# Altium PCB ALLPRINT-CAPBOARD-677512.PcbDoc (part 2 of 3)
Units mm, origin at the board's own origin, x right, y up, seen from the top; angles counter-clockwise.
Board outline 105 x 100 mm, 4 copper layers (Top Layer, Layer 1, Layer 2, Bottom Layer), stack 1.586 mm thick; 295 components, 219 nets, 882 pads, 764 vias.
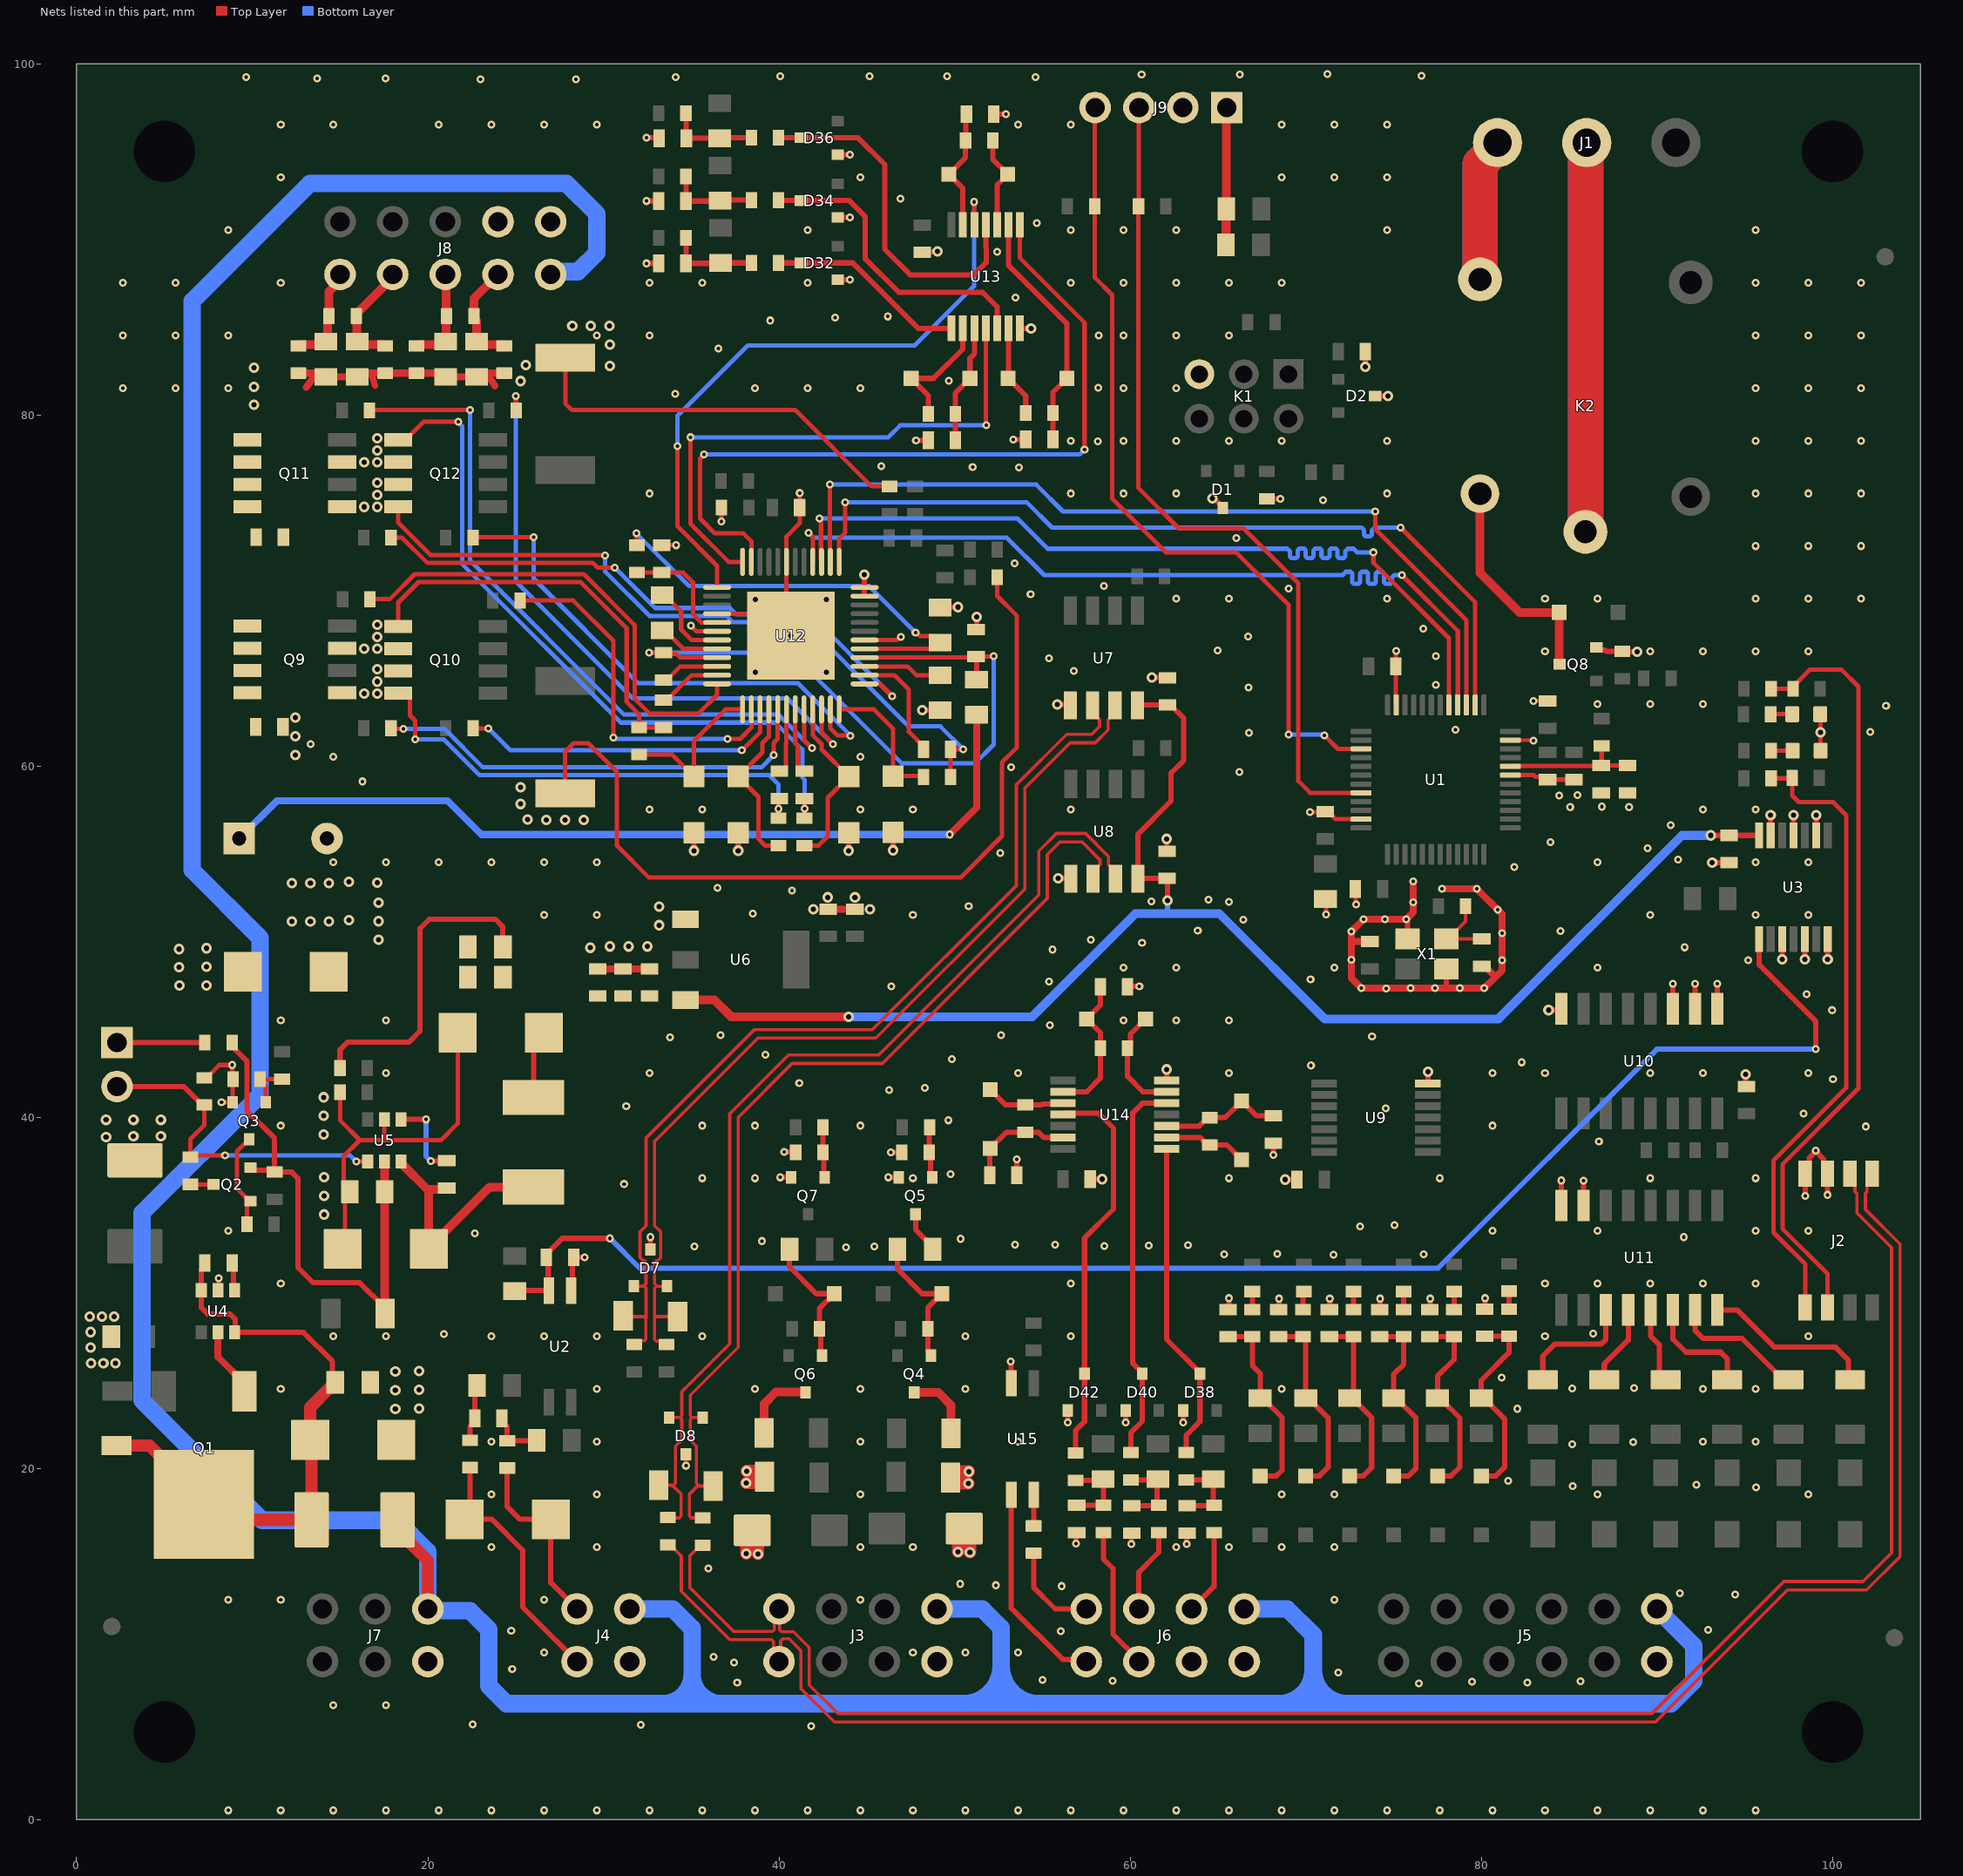
[diagram p4: the nets of this part, all layers, seen from the top]

## Via types
v1: diameter 0.45, hole 0.2, Top Layer to Bottom Layer, tented both sides, 591 vias
v2: diameter 0.6, hole 0.3, Top Layer to Bottom Layer, tented both sides, 173 vias

## Nets (pads, with @x,y where several pads share a name; then routed paths per layer and width w, separated by ;. In a path a pad name is that pad's centre, name@x,y a point inside that pad or via, vN(x,y) a via of type N, cw(c..) or ccw(c..) an arc to the next point about the centre after c; other vN are vias at no path point) (continued)
5V: C15.2 C20.2 C21.2 C22.2 C25.2 C26.2 C28.2 C29.2 D6.2 L3.2 R22.2 U3.14 U6.3 U7.8 U8.8 | length 111.1
  Top Layer w0.3: R22.2@15,42.8 15,43.85 15.425,44.275 18.925,44.275 19.55,44.9 19.55,50.75 20.075,51.275 23.85,51.275 24.275,50.85 C26.2@24.275,49.7 ; D6.2@25.67,45.73 D6.2@26.6,44.8 26.025,44.225 L3.2@26.025,41.125 ; U7.8@60.405,63.45 60.43,63.475 C28.2@62.125,63.475 62.3,63.475 63.05,62.725 63.05,60.325 62.325,59.6 62.325,58 60.43,56.105 U8.8@60.43,53.575 60.455,53.6 C29.2@62.1,53.6 62.125,53.575 62.1,53.55 62.125,53.525 v2(62.125,52.35) ; v2(93.075,56.05) C15.2@94.1,56.05 U3.14@95.825,56.05
  Top Layer w0.5: U6.3@34.675,46.675 36.325,46.675 37.275,45.725 v2(43.975,45.725)
  Bottom Layer w0.3: 62.125,51.65 v2(62.125,52.35)
  Bottom Layer w0.5: v2(43.975,45.725) 54.425,45.725 60.3,51.6 62.125,51.6 ; 62.125,51.65 62.125,51.6 ; v2(93.075,56.05) 91.425,56.05 80.975,45.6 71.075,45.6 65.075,51.6 62.125,51.6
+VM: C39.1 C41.2 C53.2 D26.2 F2.1 Q9.5 Q9.6 Q9.7 Q9.8 Q11.5 Q11.6 Q11.7 Q11.8 R60.2 | length 49.6
  Top Layer w0.4: v1(49.725,56.1) 51.25,57.625 R60.2@51.25,62.925
  Bottom Layer w0.4: C39.1@9.256,55.875 11.406,58.025 21.125,58.025 23.05,56.1 v1(49.725,56.1)
  other v2: 1.675,38.875 3.237,38.925 4.8,38.925 1.675,39.85 3.237,39.85 4.8,39.85 5.85,47.5 7.4,47.5 5.838,48.538 7.4,48.563 5.838,49.575 7.4,49.625
AUX_N: D8.2 PTC5.2 R33.1 U8.7 | length 58.4
  Top Layer w0.184: R33.1@33.15,19.05 33.921,19.05 ; PTC5.2@33.675,17.2 33.687,17.187 34.313,17.187 34.421,17.295 34.421,17.627 34.421,18.55 33.921,19.05 ; D8.2@33.75,22.9 34.351,22.9 ; U8.7@59.16,53.575 59.16,54 58.877,54.283 58.874,54.283 58.767,54.391 58.767,54.851 57.459,56.159 55.8,56.159 54.8,55.159 54.8,52.659 45.683,43.542 40.542,43.542 37.191,40.191 37.191,27.1 34.458,24.367 34.458,23.008 34.351,22.9 ; 33.921,19.05 34.001,19.05 34.108,19.158 34.108,21.271 34.458,21.621 34.458,22.792 34.351,22.9
AUX_P: D8.1 PTC4.1 R33.2 U8.6 | length 56.8
  Top Layer w0.184: PTC4.1@35.65,17.175 35.638,17.187 35.012,17.187 34.904,17.295 34.904,17.827 34.904,18.55 35.354,19 35.442,19 ; D8.1@35.65,22.9 35.049,22.9 ; R33.2@36.25,19 35.442,19 ; U8.6@57.89,53.575 57.89,54 58.173,54.283 58.176,54.283 58.283,54.391 58.283,54.651 57.259,55.675 56,55.675 55.284,54.958 55.284,52.458 45.883,43.058 40.742,43.058 37.675,39.991 37.675,26.9 34.942,24.166 34.942,23.008 35.049,22.9 ; 35.049,22.9 34.942,22.792 34.942,21.621 35.292,21.271 35.292,20.329 35.292,19.15 35.442,19
BMA1: C43.1 C44.2 J8.6 MOV1.1 MOV2.2 Q9.1 Q10.7 Q10.8 R65.2 | length 32.9
  Top Layer w0.25: Q10.8@18.306,64.145 18.731,64.145 18.981,63.895 18.981,62.884 19.275,62.59 v1(19.275,61.525) ; v1(39.975,57.563) 39.975,58.1 C44.2@40.025,58.15
  Top Layer w0.5: MOV1.1@12.625,83.925 12.7,84 14.029,84 C43.1@14.2,84.171 14.3,84.271 14.3,85.55 MOV2.2@14.375,85.625 14.375,87.023 15,87.648 J8.6@15,88
  Bottom Layer w0.25: v1(19.275,61.525) 20.9,61.525 22.95,59.475 39.45,59.475 39.975,58.95 v1(39.975,57.563)
  other v2: 16.375,64.132 17.125,64.132 17.125,64.807 17.125,65.507
BMA2: C45.2 C47.2 J8.7 MOV2.1 MOV3.2 Q9.3 Q10.5 Q10.6 R66.2 | length 29.7
  Top Layer w0.25: Q10.5@18.306,67.955 18.306,69.306 19.475,70.475 28.7,70.475 31.325,67.85 31.325,63.65 32.025,62.95 R66.2@32.025,62.2 C45.2@33.425,62.2
  Top Layer w0.5: MOV3.2@17.575,83.925 17.5,84 16.146,84 C47.2@15.975,84.171 15.95,84.196 15.95,85.6 MOV2.1@15.925,85.625 15.925,85.75 18,87.825 J8.7@18,88
  other v2: 16.375,66.672 17.125,66.672 17.125,67.347 17.125,68.047
BMB1: C56.1 C57.2 J8.9 MOV4.1 MOV5.2 Q11.1 Q12.7 Q12.8 R67.2 | length 47.4
  Top Layer w0.25: Q12.8@18.306,74.77 18.306,73.869 20.15,72.025 30.05,72.025 v1(30.088,71.988) ; R67.2@49.775,59.375 C57.2@49.775,60.95 v1(50.5,60.95)
  Top Layer w0.5: J8.9@24,88 22.625,86.625 MOV5.2@22.625,85.625 22.625,85.5 22.775,85.35 C56.1@22.775,84.171 22.946,84 24.275,84 MOV4.1@24.35,83.925
  Bottom Layer w0.25: v1(30.088,71.988) 30.088,71.085 32.622,68.55 37.001,68.55 37.351,68.2 41.447,68.2 46.222,63.425 46.225,63.425 47.393,62.257 49.193,62.257 v1(50.5,60.95)
  other v2: 16.375,74.757 17.125,74.757 17.125,75.432 17.125,76.132
BMB2: C58.2 C59.2 J8.8 MOV5.1 MOV6.2 Q11.3 Q12.5 Q12.6 R69.2 | length 46
  Top Layer w0.25: Q12.5@18.306,78.58 18.731,78.58 19.751,79.6 v1(21.725,79.6) ; R69.2@41.45,57.025 C58.2@41.45,58.15
  Top Layer w0.5: MOV6.2@19.35,83.925 19.425,84 20.85,84 C59.2@21.021,84.171 21.048,84.198 21.048,85.598 MOV5.1@21.075,85.625 21.038,85.663 21.038,87.963 J8.8@21,88
  Bottom Layer w0.25: v1(21.725,79.6) 21.725,79.579 21.95,79.354 21.95,71.514 30.989,62.475 39.789,62.475 41.325,60.939 41.325,59.346 41.45,59.221 v1(41.45,57.575)
  other v2: 16.375,77.297 17.125,77.297 17.125,77.972 17.125,78.672
CA1: C44.1 U12.42 | length 3.8
  Top Layer w0.25: C44.1@40.025,59.7 40.2,59.7 40.4,59.9 40.4,61.247 40.425,61.272 40.425,61.828 U12.42@40.425,63.225
CA2: C45.1 U12.35 | length 3.6
  Top Layer w0.25: C45.1@33.425,63.75 33.6,63.75 35.025,65.175 U12.35@36.475,65.175
CB1: C57.1 U12.2 | length 6.6
  Top Layer w0.25: U12.2@44.875,65.175 46.575,65.175 47.4,64.35 47.4,61.95 48.225,61.125 C57.1@48.225,60.95
CB2: C58.1 U12.43 | length 3.8
  Top Layer w0.25: U12.43@40.925,63.225 40.925,61.964 40.925,61.302 41.075,61.152 41.075,59.9 41.275,59.7 C58.1@41.45,59.7
CLK: U1.27 U12.14 | length 49.3
  Top Layer w0.25: v1(42.9,76.025) 42.9,71.65 U12.14@42.925,71.625 ; v1(73.95,74.5) 73.95,73.5 79.15,68.3 U1.27@79.15,63.475
  Bottom Layer w0.25: v1(42.9,76.025) 54.65,76.025 56.175,74.5 v1(73.95,74.5)
CM0: J1.2 K2.3 | length 44.4
  Top Layer w2: K2.3@85.925,73.339 85.963,73.376 85.963,95.462 J1.2@86,95.5
  Bottom Layer w2: K2.3@85.925,73.339 85.925,95.5 J1.2@86,95.5
COM_N: D7.2 PTC3.2 R31.1 U7.7 | length 54.9
  Top Layer w0.184: 32.917,28.575 32.917,30.267 33.024,30.375 33.067,30.375 ; PTC3.2@33.6,27.05 33.408,27.242 33.014,27.242 32.907,27.35 32.907,28.542 33.014,28.65 R31.1@34.225,28.65 ; D7.2@33.625,30.375 33.067,30.375 ; U7.7@59.135,63.45 59.135,63.025 58.852,62.742 58.849,62.742 58.742,62.634 58.742,62.055 58.012,61.325 56.584,61.325 54,58.742 54,52.989 45.52,44.508 38.808,44.508 32.917,38.617 32.917,33.825 33.267,33.475 33.267,32.004 33.096,31.833 33.024,31.833 32.917,31.726 32.917,30.525 33.067,30.375
COM_P: D7.1 PTC2.1 R31.2 U7.6 | length 54.9
  Top Layer w0.184: R31.2@31.125,28.7 31.175,28.65 32.315,28.65 32.423,28.542 32.423,27.371 32.315,27.263 31.963,27.263 PTC2.1@31.75,27.05 ; D7.1@31.725,30.375 32.283,30.375 ; 32.433,28.575 32.433,30.267 32.326,30.375 32.283,30.375 ; U7.6@57.865,63.45 57.865,63.025 58.148,62.742 58.151,62.742 58.258,62.634 58.258,62.255 57.811,61.809 56.383,61.809 53.517,58.942 53.517,53.189 45.319,44.992 38.608,44.992 32.433,38.817 32.433,33.825 32.083,33.475 32.083,32.004 32.254,31.833 32.326,31.833 32.433,31.726 32.433,30.525 32.283,30.375
CS: U1.26 U12.13 | length 48.4
  Top Layer w0.25: U12.13@43.425,71.625 43.425,72.95 43.775,73.3 v1(43.775,75.025) ; v1(75.4,73.575) 79.65,69.325 U1.26@79.65,63.475
  Bottom Layer w0.25: v1(43.775,75.025) 54.1,75.025 55.55,73.575 72.6,73.575 73.175,73.575 73.321,73.429 73.321,73.165 73.411,73.075 73.681,73.075 73.771,73.165 73.771,73.429 73.918,73.575 74.475,73.575 v1(75.4,73.575)
EN0: J6.6 R97.1 | length 4.9
  Top Layer w0.3: J6.6@63.5,12 64.775,13.275 R97.1@64.775,16.35
EN1: J6.7 R101.1 | length 4.8
  Top Layer w0.3: J6.7@60.5,12 60.5,14.1 61.625,15.225 R101.1@61.625,16.35
EN2: J6.3 R105.1 | length 8.2
  Top Layer w0.3: R105.1@58.475,16.35 58.475,14.85 59.025,14.3 59.025,10.55 60.5,9.075 J6.3@60.5,9
ENCA: U12.24 U13.4 | length 31.5
  Top Layer w0.25: v1(34.95,78.725) 34.95,73.8 37.125,71.625 U12.24@37.925,71.625 ; U13.4@51.775,84.925 51.788,84.912 51.788,79.413 v1(51.8,79.4)
  Bottom Layer w0.25: v1(34.95,78.725) 46.225,78.725 46.9,79.4 v1(51.8,79.4)
ENCB: U12.23 U13.8 | length 44.5
  Top Layer w0.25: v1(35.725,77.75) 35.725,77.729 35.5,77.504 35.5,74.1 36.35,73.25 37.975,73.25 38.425,72.8 U12.23@38.425,71.625 ; U13.8@53.725,90.825 53.725,88.925 57.4,85.25 v1(57.4,78.025)
  Bottom Layer w0.25: v1(35.725,77.75) 57.125,77.75 v1(57.4,78.025)
ENCN: U12.25 U13.12 | length 36.7
  Top Layer w0.25: v1(34.225,78.225) 34.225,73.65 36.475,71.4 U12.25@36.475,70.175 ; v1(51.1,92.125) 51.113,92.112 51.113,90.837 U13.12@51.125,90.825
  Bottom Layer w0.25: v1(34.225,78.225) 34.225,79.95 38.225,83.95 47.725,83.95 51.1,87.325 v1(51.1,92.125)
EXP_SCL: J9.4 R12.1 U1.39 | length 47.1
  Top Layer w0.25: J9.4@58,97.5 57.987,97.487 57.987,91.887 R12.1@57.975,91.875 57.975,87.825 58.975,86.825 58.975,75.225 62.025,72.175 66.025,72.175 69.025,69.175 v1(69.025,61.8) ; v1(71.05,61.75) 71.825,60.975 U1.39@73.15,60.975
  Bottom Layer w0.25: v1(69.025,61.8) 71,61.8 v1(71.05,61.75)
EXP_SDA: J9.3 R11.1 U1.44 | length 48.1
  Top Layer w0.25: J9.3@60.5,97.5 60.487,97.487 60.487,91.887 R11.1@60.475,91.875 60.475,75.825 62.775,73.525 65.822,73.525 66.45,73.525 69.575,70.4 69.575,59.15 70.25,58.475 U1.44@73.15,58.475
GND: C1.1 C2.1 C3.1 C4.1 C5.1 C6.1 C7.1 C8.1 C9.1 C10.1 C11.1 C12.1 C14.1 C15.1 C16.1 C17.1 C20.1 C21.1 C22.1 C23.1 C24.1 C25.1 C26.1 C27.1 C28.1 C29.1 C30.1 C31.1 C32.1 C33.1 C34.1 C35.1 C36.1 C37.1 C38.1 C39.2 C41.1 C43.2 C46.1 C47.1 C48.1 C49.1 C50.1 C52.1 C53.1 C54.1 C55.1 C56.2 C59.1 C60.1 C61.1 C63.1 C64.1 C65.1 C66.1 C67.1 C68.1 C69.1 C70.1 C71.1 D1.3 D2.3 D4.1 D5.1 D6.1 D7.3 D8.3 D10.1 D12.1 D26.1 D27.1 D28.1 D29.1 D30.1 D32.1 D34.1 D36.1 D38.1 D40.1 D42.1 J2.7 J2.8 J3.1 J4.1 J5.1 J6.1 J6.2 J7.1 J8.4 J8.5 J9.2 K1.5 L1.1 L2.1 MOV1.2 MOV3.1 MOV4.2 MOV6.1 Q3.2 Q5.2 Q7.2 Q8.2 R15.1 R23.1 R24.1 R29.2 R35.1 R38.1 R40.1 R43.1 R45.2 R64.1 R73.1 R74.2 R88.1 R91.2 U1.19 U1.23 U1.35 U1.47 U2.3 U3.3 U3.5 U3.7 U3.9 U3.11 U3.13 U4.2 U5.2 U6.1 U7.5 U8.5 U9.7 U10.1 U10.2 U10.3 U10.8 U11.7 U11.8 U12.6 U12.11 U12.12 U12.19 U12.28 U12.30 U12.49 U13.7 U14.7 U15.2 X1.2 X1.4 | length 258.4
  Top Layer w0.2: U1.23@81.65,61.475 81.663,61.463 82.962,61.463 v1(82.975,61.45) ; v1(82.975,63.7) C4.1@83.775,63.7
  Top Layer w0.25: R23.1@7.275,42.25 7.4,42.25 8.125,42.975 v1(8.85,42.975) 8.85,42.225 ccw(c8.9,42.225) R29.2@8.9,42.175 8.888,42.162 8.888,40.863 Q3.2@8.875,40.85 v1(8.25,40.85) ; U4.2@8.05,30.15 8.084,30.184 v1(8.084,30.84) ; R24.1@15,41.425 15,39.825 16.125,38.7 ; D5.1@15.15,32.5 15.287,32.637 15.287,35.337 C27.1@15.475,35.525 ; C27.1@15.55,35.75 15.2,36.1 15.2,37.775 16.125,38.7 ; U5.2@17.525,39.875 17.525,38.7 ; D6.1@21.7,44.85 D6.1@21.7,44.8 21.7,39.65 20.75,38.7 17.525,38.7 ; R73.1@27.825,58.45 27.825,60.825 28.3,61.3 29.139,61.3 30.775,59.664 30.775,55.464 32.589,53.65 50.336,53.65 52.7,56.014 52.7,60.214 53.55,61.064 53.55,68.561 52.425,69.686 R74.2@52.425,70.75 ; R88.1@27.831,83.25 27.831,80.644 28.2,80.275 40.922,80.275 45.272,75.925 R91.2@46.296,75.925 ; C50.1@33.325,72.575 v1(34.15,72.575) ; v1(34.975,68) 35.3,67.675 U12.30@36.475,67.675 ; U12.28@36.475,68.675 39.425,68.675 U12.49@40.425,67.675 ; v1(36.725,73.925) R64.1@36.725,74.725 ; v2(40.675,67.425) U12.49@40.425,67.675 ; v1(41.175,75.55) C48.1@41.175,74.725 41.175,73.825 40.425,73.075 U12.19@40.425,71.625 U12.49@40.425,67.675 ; U12.6@44.875,67.175 46.721,67.175 46.896,67.35 v1(46.95,67.35) ; v2(62.075,55.85) 62.075,55.175 C29.1@62.1,55.15 ; v1(70.25,57.375) 70.262,57.387 71.088,57.387 C2.1@71.1,57.4 71.3,57.2 71.475,57.2 71.7,56.975 U1.47@73.15,56.975 ; C1.1@71.125,52.425 v1(71.15,51.55) ; C5.1@72.825,53 v1(72.875,52.125) ; U1.35@75.15,63.475 75.138,63.488 75.138,65.663 C3.1@75.125,65.675 75.138,65.687 75.138,66.537 v1(75.15,66.55) ; U1.19@81.65,59.475 83,59.475 83.085,59.39 83.61,59.39 C8.1@83.775,59.225 C7.1@85.275,59.225 ; L1.1@99.3,62.95 99.313,62.938 v2(99.313,61.913) 99.313,60.888 L2.1@99.325,60.875 ; 16.125,38.7 17.525,38.7
  Top Layer w0.3: U2.3@28.16,30.125 28.23,30.195 28.23,31.955 C14.1@28.3,32.025 v1(28.925,32.025) ; v1(32.45,88.625) C54.1@33.15,88.625 ; v1(32.45,92.175) C60.1@33.15,92.175 ; v1(32.45,95.775) 33.15,95.775 C63.1@33.175,95.75 ; D7.3@32.675,32.475 v1(32.675,33.175) ; v1(34.7,20.15) D8.3@34.7,20.85 ; v2(35.15,55.18) D28.1@35.15,56.2 ; v2(37.675,55.18) D27.1@37.675,56.2 ; v1(40.075,36.575) Q7.2@40.7,36.575 ; v1(40.3,38.025) 40.925,38.025 R43.1@40.95,38 R43.1@40.95,37.875 ; D32.1@43.35,87.7 v1(44.05,87.7) ; D34.1@43.35,91.25 v1(44.05,91.25) ; D36.1@43.35,94.825 v1(44.05,94.825) ; v2(43.975,55.18) D30.1@43.975,56.2 ; v2(44.85,70.9) 44.85,69.7 U12.11@44.875,69.675 ; v1(46.225,36.575) Q5.2@46.825,36.575 Q5.2@46.825,36.625 ; v1(46.375,38) R38.1@47,38 ; v2(46.5,55.205) D29.1@46.5,56.225 ; v1(47.8,78.55) C55.1@48.5,78.55 ; C52.1@48.15,89.25 48.175,89.275 49,89.275 v2(49.025,89.3) ; v2(48.155,63.175) C46.1@49.175,63.175 ; C49.1@49.175,69.05 v2(50.195,69.05) ; C38.1@51.25,67.8 v2(51.25,68.495) ; C64.1@52.225,97.125 v1(52.925,97.125) ; v1(53.2,26.1) 53.215,26.085 53.215,24.865 U15.2@53.23,24.85 ; v1(53.35,78.6) C61.1@54.05,78.6 ; C70.1@53.55,36.7 v1(53.55,37.6) ; U13.7@53.725,84.925 v2(54.35,84.925) ; v2(55.85,63.5) 56.545,63.5 U7.5@56.595,63.45 ; v2(55.9,53.6) U8.5@56.595,53.6 ; v1(56.45,22.625) D42.1@56.45,23.3 ; v1(56.925,15.725) C69.1@56.925,16.325 ; C71.1@57.725,36.475 v2(58.4,36.475) ; v1(59.737,22.625) D40.1@59.737,23.3 ; C68.1@59.85,47.425 59.875,47.45 v1(60.525,47.45) ; v1(60.075,15.7) C67.1@60.075,16.3 ; v2(61.225,65.05) 61.238,65.038 62.113,65.038 C28.1@62.125,65.025 ; U14.7@62.075,42.1 v2(62.075,42.725) ; v1(63.025,22.625) D38.1@63.025,23.3 ; v1(63.225,15.7) C65.1@63.225,16.3 ; v2(64.675,75.25) 64.732,75.193 64.832,75.193 65.125,74.9 65.125,74.85 D1.3@65.275,74.7 ; C30.1@65.575,29.05 65.625,29.1 v1(65.625,29.7) ; R15.1@67.775,75.225 v1(68.55,75.225) ; v1(68.15,37.85) C66.1@68.15,38.525 ; C36.1@68.484,29.075 v1(68.484,29.675) ; v2(68.825,36.45) C31.1@69.5,36.45 ; C35.1@71.368,29.075 v1(71.368,29.675) ; v2(73.4,82.725) C12.1@73.4,83.6 ; D2.3@73.95,81.075 v2(74.675,81.075) ; C34.1@74.227,29.075 v1(74.227,29.675) ; v1(75.725,51.275) 75.725,51.234 75.8,51.159 X1.4@75.8,50.15 ; U9.7@76.95,41.925 U9.7@76.96,41.925 ; v2(76.96,42.6) U9.7@76.96,41.925 ; U9.7@77.045,42 76.97,41.925 U9.7@76.96,41.925 ; C33.1@77.086,29.075 v1(77.086,29.675) ; X1.2@78,48.45 78,47.418 78.068,47.35 ; C32.1@80.22,29.1 v1(80.22,29.7) ; v2(83.825,46.1) 84.485,46.1 U10.8@84.553,46.168 ; v1(84.55,36.4) 84.552,36.398 84.552,34.974 U11.8@84.555,34.972 ; U11.7@85.827,34.971 v1@85.827,36.394 ; Q8.2@86.55,66.75 86.7,66.6 87.05,66.6 87.125,66.525 R45.2@88.025,66.525 88.037,66.512 88.862,66.512 v2(88.875,66.5) ; U10.3@90.903,46.168 v1@90.903,47.591 ; U10.2@92.173,46.168 v1@92.173,47.591 ; v2(93.15,54.5) C15.1@94.1,54.5 ; U10.1@93.443,46.168 v1@93.443,47.591 ; v2(95.05,42.45) 95.05,41.802 C37.1@95.102,41.749 ; U3.13@96.475,56.05 v2(96.475,57.2) ; v2(97.125,49) U3.3@97.125,50.15 ; U3.11@97.775,56.05 v2(97.775,57.2) ; J2.8@98.42,36.76 98.45,36.73 v1(98.45,35.525) ; v2(98.425,49) U3.5@98.425,50.15 ; J2.8@98.445,36.785 98.676,37.016 98.676,37.685 v1@99.05,38.059 ; v1(99.05,38.1) v1@99.05,38.059 ; U3.9@99.075,56.05 v2(99.075,57.2) ; v1(99.715,35.58) J2.7@99.715,36.785 99.484,37.016 99.484,37.625 v1@99.05,38.059 ; v2(99.725,49) U3.7@99.725,50.15
  Top Layer w0.35: 16.775,82.375 17,81.65
  Top Layer w0.4: MOV1.2@12.625,82.375 14.2,82.375 C43.2@14.2,82.171 C47.1@15.975,82.171 15.975,82.375 16.775,82.375 MOV3.1@17.575,82.375 MOV6.1@19.35,82.375 21.021,82.375 C59.1@21.021,82.171 C56.2@22.775,82.171 22.775,82.375 MOV4.2@24.35,82.375 ; 13.075,81.575 C43.2@13.589,82.275 ; C56.2@23.358,82.344 23.825,81.65 ; C20.1@29.675,48.45 C22.1@31.113,48.45 C21.1@32.625,48.45 ; C23.1@42.8,51.85 C24.1@44.325,51.85 ; C10.1@73.65,50 72.6,50 ; v1(76.125,53.425) v1(76.125,52.25) 76.125,51.675 v1(75.725,51.275) v1(74.513,51.275) v1(73.3,51.275) v1(72.6,50.575) 72.6,50 ; v1(77.747,53) v1(79.75,53) 81.175,51.575 81.175,48.359 80.795,47.979 ; C11.1@80.025,48.6 80.2,48.6 80.795,48.005 80.795,47.979 ; 72.6,50 72.6,47.925 v1(73.175,47.35) v1(75.971,47.35) v1(77.369,47.35) 78.068,47.35 v1(78.768,47.35) v1(80.166,47.35) 80.795,47.979
  Top Layer w0.7: v2(38.125,15.155) D12.1@38.125,16.175 ; v2(38.13,19.175) R40.1@39.15,19.175 ; v2(38.155,19.85) R40.1@39.175,19.85 ; v2(38.8,15.13) D12.1@38.8,16.15 ; R35.1@49.775,19.15 v2(50.795,19.15) ; R35.1@49.8,19.825 v2(50.82,19.825) ; v2(50.2,15.255) D10.1@50.2,16.275 ; v2(50.875,15.23) D10.1@50.875,16.25
  other v1: 8.625,0.525 11.625,0.525 14.625,0.525 17.625,0.525 20.625,0.525 23.625,0.525 26.625,0.525 29.625,0.525 32.625,0.525 35.625,0.525 38.625,0.525 41.625,0.525 44.625,0.525 47.625,0.525 50.625,0.525 53.625,0.525 56.625,0.525 59.625,0.525 62.625,0.525 65.625,0.525 68.625,0.525 71.625,0.525 74.625,0.525 77.625,0.525 80.625,0.525 83.625,0.525 86.625,0.525 89.625,0.525 92.625,0.525 95.625,0.525 41.825,5.325 32.125,5.4 22.55,5.425 14.625,6.525 17.625,6.525 76.45,7.75 37.625,7.8 82.625,7.8 79.475,7.85 85.648,7.874 59,7.9 55,7.95 71.85,8.375 24.8,8.575 37.45,8.95 36.275,9.275 26.625,9.525 47.625,9.525 50.625,9.525 53.625,9.525 56.05,10.725 24.75,10.75 92.925,10.8 8.625,12.525 11.625,12.525 26.625,12.525 44.625,12.525 71.625,12.525 94.45,12.825 91.3,12.9 56.1,13.3 52.35,13.35 50.325,13.425 35.975,14.3 23.625,15.525 29.625,15.525 44.625,15.525 47.625,15.525 62.625,15.525 65.625,15.525 68.625,15.525 71.625,15.525 23.625,18.525 29.625,18.525 44.625,18.525 68.625,18.525 71.625,18.525 86.625,18.525 98.625,18.525 95.65,18.925 85.2,19 92.25,19.075 81.525,19.3 85.175,21.375 88.65,21.5 23.625,21.525 29.625,21.525 44.625,21.525 53.625,21.525 92.625,21.525 95.625,21.525 82.05,23.4 11.625,24.525 29.625,24.525 38.625,24.525 44.625,24.525 50.625,24.525 68.625,24.525 92.625,24.525 95.625,24.525 85.175,24.55 88.7,24.575 81.15,25.175 14.625,27.525 17.625,27.525 23.625,27.525 26.625,27.525 29.625,27.525 35.625,27.525 50.625,27.525 56.625,27.525 83.625,27.525 98.625,27.525 20.925,27.65 86.375,27.675 11.625,30.525 56.625,30.525 83.625,30.525 86.625,30.525 89.625,30.525 92.625,30.525 95.625,30.525 71.575,32.175 65.35,32.2 76.725,32.2 68.375,32.225 43.825,32.6 35.175,32.65 45.425,32.65 58.525,32.675 61.05,32.7 53.433,32.73 63.3,32.725 55.725,32.75 39.025,32.95 50.35,33.075 91.525,33.175 22.675,33.375 8.625,33.525 80.625,33.525 86.625,33.525 95.625,33.525 98.625,33.525 73.1,33.775 75.05,33.85 31.175,36.2 85.825,36.397 35.625,36.525 38.625,36.525 47.625,36.525 65.625,36.525 77.625,36.525 89.625,36.525 95.625,36.525 49.775,36.75 86.7,38.625 101.9,39.475 11.625,39.525 35.625,39.525 38.625,39.525 44.625,39.525 80.625,39.525 49.65,39.825 98.35,40.2 74.55,40.5 31.3,40.625 46.275,41.55 48.3,41.675 41.15,41.95 100.025,42.175 17.625,42.525 32.625,42.525 53.625,42.525 65.625,42.525 80.625,42.525 83.625,42.525 89.625,42.525 92.625,42.525 98.625,42.525 70.3,42.95 82.3,43.125 49.85,43.3 39.225,43.55 33.8,44.55 73.775,44.6 36.675,44.675 52.65,44.675 55.425,45.25 11.625,45.525 17.625,45.525 59.625,45.525 62.625,45.525 65.625,45.525 99.975,46.1 98.525,47 74.573,47.325 46.4,47.45 90.9,47.594 92.17,47.594 93.44,47.594 55.375,47.725 70.275,47.85 59.625,48.525 62.625,48.525 71.625,48.525 86.625,48.525 72.6,48.963 81.175,48.95 95.2,48.95 55.575,49.55 91.575,49.675 60.675,49.925 57.75,50.1 81.175,50.475 84.5,50.6 63.85,50.625 66.45,51.25 26.625,51.525 29.625,51.525 47.625,51.525 89.625,51.525 95.625,51.525 98.625,51.525 38.5,51.6 80.925,51.825 50.8,52.025 65.625,52.275 61.2,52.3 64.45,52.4 40.737,52.905 36.5,53.05 81.875,54.25 14.625,54.525 17.625,54.525 20.625,54.525 23.625,54.525 26.625,54.525 29.625,54.525 86.625,54.525 95.625,54.525 98.625,54.525 91.2,54.675 52.6,55.05 89.475,55.325 83.925,55.675 90.775,56.625 32.625,57.525 35.625,57.525 44.625,57.525 47.625,57.525 56.625,57.525 92.625,57.525 95.625,57.525 85.063,57.662 88.413,57.662 86.863,57.687 84.438,58.312 85.463,58.337 16.275,59.125 66.225,59.65 53.225,59.925 14.625,60.525 44.625,60.525 13.325,61.25 66.775,61.9 102.15,61.95 78.525,62.075 103.05,63.425 86.625,63.525 89.625,63.525 92.625,63.525 66.75,64.475 77.4,64.625 56.8,65.425 55.375,66.125 77.4,66.25 83.625,66.525 89.625,66.525 92.625,66.525 95.625,66.525 98.625,66.525 64.975,66.575 66.725,67.375 76.7,67.825 62.625,69.525 65.625,69.525 74.625,69.525 83.625,69.525 86.625,69.525 95.625,69.525 98.625,69.525 101.625,69.525 54.325,69.775 69.025,70.1 58.5,70.25 53.425,71.55 95.625,72.525 98.625,72.525 101.625,72.525 66.05,72.975 70.975,75.15 32.625,75.525 56.625,75.525 59.625,75.525 62.625,75.525 74.625,75.525 95.625,75.525 98.625,75.525 101.625,75.525 53.655,77 51.025,77.025 45.825,77.075 58.15,78.5 56.625,78.525 59.625,78.525 62.625,78.525 65.625,78.525 68.625,78.525 74.625,78.525 95.625,78.525 98.625,78.525 101.625,78.525 34.1,81.2 2.625,81.525 5.625,81.525 8.625,81.525 38.625,81.525 41.625,81.525 44.625,81.525 59.625,81.525 62.625,81.525 95.625,81.525 98.625,81.525 101.625,81.525 58.175,81.55 49.675,81.95 36.55,83.775 2.625,84.525 5.625,84.525 8.625,84.525 29.625,84.525 32.625,84.525 58.2,84.525 59.625,84.525 62.625,84.525 65.625,84.525 95.625,84.525 98.625,84.525 101.625,84.525 39.5,85.375 43.195,85.541 46.2,85.6 53.475,86.675 2.625,87.525 5.625,87.525 11.625,87.525 32.625,87.525 35.625,87.525 41.625,87.525 56.625,87.525 59.625,87.525 62.625,87.525 65.625,87.525 68.625,87.525 95.625,87.525 98.625,87.525 101.625,87.525 52.425,89.275 8.625,90.525 41.625,90.525 56.625,90.525 59.625,90.525 62.625,90.525 74.625,90.525 95.625,90.525 54.675,90.925 46.925,92.3 11.625,93.525 44.625,93.525 68.625,93.525 71.625,93.525 74.625,93.525 11.625,96.525 14.625,96.525 20.625,96.525 23.625,96.525 26.625,96.525 29.625,96.525 53.625,96.525 56.625,96.525 68.625,96.525 71.625,96.525 74.625,96.525 23,99.1 28.425,99.1 13.7,99.15 17.6,99.15 9.65,99.225 34.125,99.225 54.6,99.225 40.075,99.275 45.15,99.275 49.575,99.275 76.6,99.3 60.65,99.375 66.25,99.375 71.225,99.4
  other v2: 18.15,23.388 19.5,23.413 18.15,24.45 19.5,24.475 18.15,25.512 19.5,25.537 0.825,26 1.525,26 2.2,26 0.8,26.883 0.8,27.767 0.75,28.65 1.45,28.65 2.125,28.65 14.1,34.463 14.1,35.525 14.1,36.587 14.075,39.013 14.075,40.075 14.075,41.137 29.25,49.65 30.375,49.725 31.438,49.725 32.5,49.725 17.2,50.1 33.175,50.938 12.25,51.15 13.312,51.15 14.375,51.15 17.2,51.162 15.5,51.225 41.95,51.85 45.175,51.85 33.175,52 17.2,52.225 42.775,52.525 44.325,52.525 12.25,53.325 13.312,53.325 14.375,53.325 17.125,53.35 15.5,53.4 26.75,56.925 27.813,56.925 28.875,56.925 25.675,56.95 25.275,57.838 25.275,58.8 12.45,60.638 12.45,61.7 12.45,62.762 38.65,65.35 42.7,65.35 38.65,69.475 42.7,69.475 10.1,80.575 10.1,81.6 25.275,81.925 10.1,82.675 30.375,82.775 25.575,82.825 30.375,84 28.225,85.075 29.287,85.075 30.35,85.075
H_RS485_N: J2.5 J3.4 PTC5.1 | length 105.7
  Top Layer w0.184: PTC5.1@33.675,15.65 33.8,15.65 34.441,15.009 34.441,13.008 37.198,10.251 39.583,10.251 39.691,10.144 39.691,9.309 J3.4@40,9 40.091,9.091 40.091,10.176 40.213,10.298 40.574,10.298 41.241,9.63 41.241,7.475 43.158,5.558 89.917,5.558 97.434,13.075 101.934,13.075 103.842,14.983 103.842,32.783 101.875,34.75 101.875,35.669 101.966,35.759 101.966,36.496 J2.5@102.255,36.785
H_RS485_P: J2.6 J3.8 PTC4.2 | length 104.5
  Top Layer w0.184: PTC4.2@35.65,15.625 35.525,15.625 34.925,15.025 34.925,13.209 37.409,10.725 39.639,10.725 39.739,10.824 39.739,11.739 J3.8@40,12 ; J3.8@40.026,11.537 J3.8@40.026,11.974 ; J2.6@100.985,36.785 101.274,36.496 101.274,35.759 101.391,35.642 101.391,34.55 102.166,33.775 103.358,32.583 103.358,15.183 101.734,13.559 97.234,13.559 89.717,6.042 43.358,6.042 41.725,7.675 41.725,9.8 40.825,10.7 40.15,10.7 40.026,10.824 J3.8@40.026,11.974 ; J3.8@40,12 J3.8@40.026,11.974 ; J3.8@40,12 J3.8@40.026,11.974
HA1: R62.1 U12.41 | length 25.7
  Top Layer w0.25: R62.1@17.9,62.15 17.925,62.125 v1(18.6,62.125) ; v1(39.7,60.625) 39.7,61.325 39.925,61.55 U12.41@39.925,63.225
  Bottom Layer w0.25: v1(18.6,62.125) 20.936,62.125 23.136,59.925 39,59.925 v1(39.7,60.625)
HA2: R63.2 U12.36 | length 27.2
  Top Layer w0.25: R63.2@16.7,69.5 17.825,69.5 19.25,70.925 28.886,70.925 31.775,68.036 31.775,63.836 32.636,62.975 35.4,62.975 36.475,64.05 U12.36@36.475,64.675
HB1: R79.1 U12.1 | length 34.2
  Top Layer w0.25: R79.1@17.9,73 18.539,73 19.964,71.575 29.391,71.575 29.666,71.3 v1(30.65,71.3) ; U12.1@44.875,64.675 44.881,64.669 45.756,64.669 v1(46.45,63.975)
  Bottom Layer w0.25: v1(30.65,71.3) 32.95,69 37.188,69 37.538,68.65 41.775,68.65 v1(46.45,63.975)
HB2: R80.2 U12.44 | length 40.6
  Top Layer w0.25: R80.2@16.675,80.25 16.7,80.275 v1(22.4,80.275) ; U12.44@41.425,63.225 41.425,61.475 v1(41.875,61.025)
  Bottom Layer w0.25: v1(22.4,80.275) 22.4,71.7 31.175,62.925 39.975,62.925 v1(41.875,61.025)
INDEX: D3.1 FB1.1 J4.2 | length 14.7
  Top Layer w0.3: FB1.1@22.4,20.05 22.4,17.4 D3.1@22.1,17.1 23.65,17.1 25.4,15.35 25.4,12.1 26.026,11.474 J4.2@28.5,9
INDEX': D3.2 FB2.1 J4.4 | length 10.7
  Top Layer w0.3: FB2.1@24.525,20.025 24.525,17.825 25.25,17.1 D3.2@27,17.1 27,13.5 J4.4@28.5,12
ISO_PGM_C: J6.8 PTC14.2 | length 5.5
  Top Layer w0.3: PTC14.2@54.5,15.175 54.5,13.225 55.725,12 J6.8@57.5,12
ISO_PGM_E: J6.4 U15.3 | length 12
  Top Layer w0.3: U15.3@53.23,18.5 53.23,12.045 56.15,9.125 57.375,9.125 J6.4@57.5,9
LA1: R70.1 U12.39 | length 18.6
  Top Layer w0.25: R70.1@22.575,62.15 v1(23.45,62.15) ; v1(37.875,60.9) 37.9,60.9 38.925,61.925 U12.39@38.925,63.225
  Bottom Layer w0.25: v1(23.45,62.15) 24.7,60.9 v1(37.875,60.9)
LA2: R71.2 U12.38 | length 21
  Top Layer w0.25: R71.2@25.25,69.425 28.275,69.425 30.575,67.125 v1(30.575,61.625) ; v1(37.075,61.55) 37.785,61.55 38.425,62.19 U12.38@38.425,63.225
  Bottom Layer w0.25: v1(30.575,61.625) 30.65,61.55 v1(37.075,61.55)
LB1: R85.1 U12.47 | length 30
  Top Layer w0.25: R85.1@22.575,73 22.6,73.025 v1(26.025,73.025) ; U12.47@42.925,63.225 42.931,63.219 42.931,62.144 43.325,61.75 44.05,61.75 v1(44.075,61.725)
  Bottom Layer w0.25: v1(26.025,73.025) 26.025,70.675 31.975,64.725 41.075,64.725 v1(44.075,61.725)
LB2: R86.2 U12.46 | length 35.5
  Top Layer w0.25: v1(25,81.075) 25.013,81.062 25.013,80.262 R86.2@25.025,80.25 ; U12.46@42.425,63.225 42.425,61.9 v1(43.075,61.25)
  Bottom Layer w0.25: v1(25,81.075) 25,70.525 31.675,63.85 40.475,63.85 v1(43.075,61.25)
MISO: U1.28 U12.16 | length 48.6
  Top Layer w0.25: v1(41.684,73.275) 41.925,73.034 U12.16@41.925,71.625 ; v1(75.475,70.875) 78.662,67.687 78.662,63.475 U1.28@78.65,63.475
  Bottom Layer w0.25: v1(41.684,73.275) 41.959,73 52.975,73 55.1,70.875 71.925,70.875 72.102,70.875 72.286,71.06 72.556,71.06 72.646,70.97 72.646,70.465 72.736,70.375 73.006,70.375 73.096,70.465 73.096,70.97 73.186,71.06 73.456,71.06 73.546,70.97 73.546,70.465 73.636,70.375 73.906,70.375 73.996,70.465 73.996,70.97 74.086,71.06 74.356,71.06 74.446,70.97 74.446,70.465 74.536,70.375 74.806,70.375 74.896,70.465 74.896,70.729 75.043,70.875 75.214,70.875 v1(75.475,70.875)
MOSI: U1.29 U12.15 | length 48.8
  Top Layer w0.25: v1(42.3,74.1) 42.39,74.01 42.39,71.71 42.45,71.65 U12.15@42.425,71.625 ; v1(73.85,72.175) 73.85,71.575 78.15,67.275 U1.29@78.15,63.475
  Bottom Layer w0.25: v1(42.3,74.1) 53.575,74.1 55.3,72.375 68.375,72.375 68.95,72.375 69.096,72.229 69.096,71.935 69.186,71.845 69.456,71.845 69.546,71.935 69.546,72.296 69.636,72.386 69.906,72.386 69.996,72.296 69.996,71.935 70.086,71.845 70.356,71.845 70.446,71.935 70.446,72.296 70.536,72.386 70.806,72.386 70.896,72.296 70.896,71.935 70.986,71.845 71.256,71.845 71.346,71.935 71.346,72.296 71.436,72.386 71.706,72.386 71.796,72.296 71.796,71.935 71.886,71.845 72.156,71.845 72.246,71.935 72.246,72.229 72.393,72.375 72.718,72.375 72.918,72.175 v1(73.85,72.175)
NA0: J1.3 K2.5 | length 16.4
  Top Layer w2: K2.5@79.925,87.711 79.925,94.289 80.92,95.284 J1.3@80.92,95.5
  Bottom Layer w2: K2.5@79.925,87.711 79.925,94.289 80.92,95.284 J1.3@80.92,95.5
NetC6_2: C6.2 C9.2 R7.2 U1.20 | length 7.8
  Top Layer w0.25: U1.20@81.65,59.975 81.675,60 86.8,60 C6.2@86.825,60.025 ; R7.2@86.85,61.15 86.85,60.05 C6.2@86.825,60.025 ; C9.2@88.325,60.025 C6.2@86.825,60.025
NetC11_2: C11.2 R8.1 X1.3 | length 4.3
  Top Layer w0.2: X1.3@78,50.15 X1.3@78.1,50.15 ; R8.1@79.1,52.025 79.1,51.15 X1.3@78.1,50.15 ; C11.2@80.025,50.15 X1.3@78.1,50.15
NetC13_1: C13.1 FB2.2 R19.1 | length 3.1
  Top Layer w0.3: C13.1@24.225,22.85 24.225,22.675 24.525,22.375 FB2.2@24.525,21.575 26.175,21.575 R19.1@26.2,21.6
NetC13_2: C13.2 FB1.2 R16.2 | length 3.3
  Top Layer w0.3: FB1.2@22.4,21.6 22.4,22.4 22.675,22.675 C13.2@22.675,22.85 22.675,24.6 R16.2@22.8,24.725
NetC14_2: C14.2 R17.1 U2.4 U3.1 | length 90.2
  Top Layer w0.3: R17.1@24.95,30.125 U2.4@26.89,30.125 26.858,30.157 26.858,31.992 C14.2@26.825,32.025 ; C14.2@26.75,32.025 26.75,32.2 26.925,32.375 27.65,33.1 v1(30.375,33.1) ; U3.1@95.825,50.15 95.825,48.675 99.05,45.45 v1(99.05,43.875)
  Bottom Layer w0.3: v1(30.375,33.1) 32.075,31.4 77.525,31.4 90,43.875 v1(99.05,43.875)
NetC17_2: C17.2 C18.2 D4.2 F1.2 Q1.4 R20.1 U4.3 U4.6 | length 34.2
  Top Layer w0.3: C18.2@7.3,31.7 7.3,31.525 7.1,31.325 U4.3@7.1,30.15 7.1,29.15 7.45,28.8 8.725,28.8 9.025,28.5 9.025,27.775 U4.6@9,27.75 10.6,27.75 12.925,27.75 14.575,26.1 C17.2@14.575,24.925 ; D4.2@13.3,21.625 D4.2@13.3,21.675
  Top Layer w0.7: R20.1@2.275,21.3 4.15,21.3 7.25,18.2 Q1.4@7.25,17.95 8.125,17.075 F1.2@13.375,17.075 13.375,21.55 D4.2@13.3,21.625 ; D4.2@13.3,21.675 13.3,23.475 14.425,24.6 C17.2@14.575,24.6
NetC18_1: C18.1 U4.1 | length 1.6
  Top Layer w0.3: C18.1@8.85,31.7 8.925,31.625 8.925,30.225 U4.1@9,30.15
NetC19_1: C19.1 D5.2 L3.1 U5.6 | length 14.1
  Top Layer w0.5: U5.6@18.475,37.475 18.475,37.39 20.05,35.815 ; D5.2@20.05,32.5 D5.2@20.05,32.55 ; C19.1@21.075,35.975 21,35.9 20.135,35.9 20.05,35.815 ; L3.1@26.025,36.025 23.525,36.025 D5.2@20.05,32.55 ; D5.2@20.05,32.55 20.05,35.815
NetC19_2: C19.2 U5.1 | length 4.8
  Top Layer w0.3: U5.1@18.475,39.875 18.487,39.887 18.5,39.875 v1(19.9,39.875) ; v1(20.175,37.5) 20.188,37.513 21.063,37.513 C19.2@21.075,37.525
  Bottom Layer w0.3: v1(19.9,39.875) 19.9,37.775 v1(20.175,37.5)
NetC27_2: C27.2 PTC1.2 Q2.2 R21.1 R26.2 U5.5 | length 30.7
  Top Layer w0.3: R21.1@8.9,44 8.975,44 9.025,43.95 9.025,43.875 9.7,43.2 9.7,40.375 11.275,38.8 R26.2@11.275,36.875 ; Q2.2@9.9,37.125 10.05,36.975 11.175,36.975 R26.2@11.275,36.875 ; PTC1.2@17.55,29 17.55,29.15 16.125,30.575 13.475,30.575 12.6,31.45 12.6,36.525 12.25,36.875 R26.2@11.275,36.875
  Top Layer w0.5: U5.5@17.525,37.475 17.538,37.462 17.538,35.763 C27.2@17.55,35.75 PTC1.2@17.55,29
NetC30_2: C30.2 D14.1 FB3.1 R46.2 | length 11.2
  Top Layer w0.3: C30.2@65.575,27.5 FB3.1@66.955,27.5 66.955,25.845 67.4,25.4 R46.2@67.4,24 67.55,24 68.65,22.9 68.65,19.9 68.325,19.575 D14.1@67.4,19.575
NetC32_2: C32.2 D15.1 FB4.1 R48.2 | length 11.7
  Top Layer w0.3: D15.1@80,19.575 80.825,19.575 81.325,20.075 81.325,22.825 80.15,24 R48.2@80,24 80,25.025 81.575,26.6 FB4.1@81.575,27.525 C32.2@80.195,27.525
NetC33_2: C33.2 D16.1 FB5.1 R50.2 | length 11.3
  Top Layer w0.3: C33.2@77.061,27.5 FB5.1@78.441,27.5 78.441,26.191 77.5,25.25 R50.2@77.5,24 77.65,24 78.775,22.875 78.775,20.075 78.275,19.575 D16.1@77.5,19.575
NetC34_2: C34.2 D17.1 FB6.1 R52.2 | length 11.2
  Top Layer w0.3: C34.2@74.202,27.5 FB6.1@75.582,27.5 75.582,25.932 75,25.35 R52.2@75,24 75.15,24 76.275,22.875 76.275,20 75.85,19.575 D17.1@75,19.575
NetC35_2: C35.2 D18.1 FB7.1 R54.2 | length 11
  Top Layer w0.3: C35.2@71.343,27.5 FB7.1@72.723,27.5 72.723,24.223 R54.2@72.5,24 72.65,24 73.75,22.9 73.75,20.05 73.275,19.575 D18.1@72.5,19.575
NetC36_2: C36.2 D19.1 FB8.1 R56.2 | length 11
  Top Layer w0.3: C36.2@68.459,27.5 FB8.1@69.839,27.5 70,27.339 R56.2@70,24 70.15,24 71.275,22.875 71.275,20.075 70.775,19.575 D19.1@70,19.575
NetC38_2: C38.2 C40.2 R60.1 U12.4 U12.33 | length 40.3
  Top Layer w0.25: v1(32.6,66.45) C40.2@33.425,66.45 33.5,66.375 34.175,66.375 34.375,66.175 U12.33@36.475,66.175 ; U12.4@44.875,66.175 44.881,66.181 C38.2@51.181,66.181 ; C38.2@51.225,66.225 51.238,66.238 52.213,66.238 v1(52.225,66.25)
  Top Layer w0.3: C38.2@51.225,66.225 51.25,66.2 R60.1@51.25,64.925
  Bottom Layer w0.25: v1(32.6,66.45) 40.7,66.45 47,60.15 51.15,60.15 52.225,61.225 v1(52.225,66.25)
NetC40_1: C40.1 U12.34 | length 3.4
  Top Layer w0.25: C40.1@33.425,64.9 33.6,64.9 34.375,65.675 U12.34@36.475,65.675
NetC42_1: C42.1 U12.31 | length 4.8
  Top Layer w0.25: C42.1@33.35,69.725 33.5,69.725 34.425,68.8 34.425,67.772 35.022,67.175 U12.31@36.475,67.175
NetC42_2: C42.2 U12.32 | length 3.6
  Top Layer w0.25: C42.2@33.35,67.725 33.725,67.35 33.875,67.35 34.545,66.681 36.469,66.681 U12.32@36.475,66.675
NetC46_2: C46.2 U12.3 | length 4.5
  Top Layer w0.25: U12.3@44.875,65.675 47.325,65.675 47.825,65.175 C46.2@49.175,65.175
NetC49_2: C49.2 R68.1 U12.5 | length 25
  Top Layer w0.25: v1(31.875,73.25) 31.875,72.6 R68.1@31.9,72.575 ; U12.5@44.875,66.675 48.925,66.675 C49.2@49.175,66.925 ; v1(47.775,67.6) 47.829,67.6 48.029,67.4 48.8,67.4 C49.2@49.175,67.025
  Bottom Layer w0.25: v1(31.875,73.25) 34.875,70.25 45.125,70.25 v1(47.775,67.6)
NetC50_2: C50.2 R68.2 U12.29 | length 6.8
  Top Layer w0.25: R68.2@31.9,71.025 C50.2@33.325,71.025 34.525,71.025 35.1,70.45 35.1,68.653 35.572,68.181 36.469,68.181 U12.29@36.475,68.175
NetC54_2: C54.2 R75.1 R76.1 R78.2 | length 5.2
  Top Layer w0.3: R78.2@34.7,90.075 C54.2@34.7,88.625 36.65,88.625 R75.1@36.675,88.65 R76.1@38.425,88.65
NetC55_2: C55.2 D31.1 R77.2 U13.3 | length 6.8
  Top Layer w0.3: C55.2@50.05,78.55 R77.2@50.05,80.05 50.05,81.25 D31.1@50.875,82.075 50.875,83.225 51.125,83.475 U13.3@51.125,84.925
NetC60_2: C60.2 R81.1 R82.1 R84.2 | length 5.1
  Top Layer w0.3: R84.2@34.7,93.575 C60.2@34.7,92.175 36.625,92.175 R81.1@36.65,92.2 36.675,92.225 R82.1@38.425,92.225
NetC61_2: C61.2 D33.1 R83.2 U13.9 | length 13.9
  Top Layer w0.3: U13.9@53.075,90.825 53.075,88.5 56.4,85.175 D33.1@56.4,82.075 55.6,81.275 R83.2@55.6,80.1 C61.2@55.6,78.6
NetC63_2: C63.2 R89.1 R90.1 R93.2 | length 5.1
  Top Layer w0.3: R93.2@34.7,97.175 34.713,97.162 34.713,95.762 C63.2@34.725,95.75 R89.1@36.625,95.75 36.65,95.775 R90.1@38.425,95.775
NetC64_2: C64.2 D35.1 R92.2 U13.13 | length 7
  Top Layer w0.3: U13.13@50.475,90.825 50.475,92.9 D35.1@49.675,93.7 50.625,94.65 R92.2@50.625,95.625 50.65,95.65 50.65,97.1 C64.2@50.675,97.125
NetC65_2: C65.2 R94.1 R95.1 R97.2 | length 4.6
  Top Layer w0.3: R95.1@63.2,19.35 64.675,19.35 R94.1@64.725,19.4 64.725,17.95 R97.2@64.775,17.9 64.762,17.888 63.262,17.888 C65.2@63.25,17.875
NetC66_2: C66.2 D37.1 R96.2 U14.3 | length 7
  Top Layer w0.3: U14.3@62.075,39.5 63.925,39.5 64.4,39.975 R96.2@64.525,39.975 65.4,39.975 D37.1@66.35,40.925 67.2,40.075 C66.2@68.15,40.075
NetC67_2: C67.2 R98.1 R99.1 R101.2 | length 4.6
  Top Layer w0.3: R99.1@60.05,19.35 R98.1@61.525,19.35 ; C67.2@60.1,17.875 60.112,17.888 61.612,17.888 R101.2@61.625,17.9 61.525,18 R98.1@61.525,19.35 ; R98.1@61.575,19.4 R98.1@61.525,19.35
NetC68_2: C68.2 D39.1 R100.2 U14.9 | length 8.3
  Top Layer w0.3: U14.9@56.175,41.45 57.525,41.45 58.3,42.225 R100.2@58.3,43.925 58.3,44.825 D39.1@57.525,45.6 58.3,46.375 C68.2@58.3,47.425
NetC69_2: C69.2 R102.1 R103.1 R105.2 | length 4.6
  Top Layer w0.3: R103.1@56.9,19.325 58.375,19.325 R102.1@58.45,19.4 58.475,19.375 R105.2@58.475,17.9 C69.2@56.95,17.9
NetC70_2: C70.2 D41.1 R104.2 U14.13 | length 6.2
  Top Layer w0.3: C70.2@52,36.7 52.012,36.712 52.012,38.212 D41.1@52.025,38.225 52.95,39.15 R104.2@54.025,39.15 54.775,39.15 55.075,38.85 U14.13@56.175,38.85
NetD9_1: D9.1 Q4.1 R34.1 R36.1 | length 8.2
  Top Layer w0.3: R36.1@46.75,32.475 46.75,31.35 48.15,29.95 D9.1@49.275,29.95 48.475,29.15 R34.1@48.475,27.95 48.475,26.65 48.65,26.475 Q4.1@48.65,26.425
NetD11_1: D11.1 Q6.1 R39.1 R41.1 | length 8.1
  Top Layer w0.3: R41.1@40.6,32.475 40.6,31.475 42.125,29.95 D11.1@43.15,29.95 42.3,29.1 R39.1@42.3,27.95 42.375,27.875 42.375,26.5 Q6.1@42.45,26.425
NetD13_1: D13.1 K2.2 Q8.3 | length 12.9
  Top Layer w0.5: K2.2@79.925,75.511 79.925,71 82.175,68.75 D13.1@84.425,68.75 84.437,68.738 84.437,65.812 Q8.3@84.45,65.8
NetD27_2: D27.2 R65.1 U12.40 | length 9.9
  Top Layer w0.25: U12.40@39.425,63.225 39.425,61.687 39.05,61.311 39.05,60.775 D27.2@37.675,59.4 38.825,58.25 38.825,55.85 39.2,55.475 R65.1@39.975,55.475
NetD28_2: D28.2 R66.1 U12.37 | length 9.2
  Top Layer w0.25: R66.1@32.025,60.65 33.9,60.65 D28.2@35.15,59.4 35.15,61.425 36.95,63.225 U12.37@37.925,63.225
NetD29_2: D29.2 R67.1 U12.48 | length 8
  Top Layer w0.25: U12.48@43.425,63.225 45.4,63.225 46.5,62.125 D29.2@46.5,59.425 48.175,59.425 R67.1@48.225,59.375
NetD30_2: D30.2 R69.1 U12.45 | length 10.1
  Top Layer w0.25: R69.1@41.45,55.475 42.25,55.475 42.775,56 42.775,58.2 D30.2@43.975,59.4 42.425,60.95 42.425,61.253 41.925,61.753 U12.45@41.925,63.225
NetD31_2: D31.2 R77.1 U13.2 | length 7.2
  Top Layer w0.3: R77.1@48.5,80.05 48.5,81.1 D31.2@47.525,82.075 48.8,82.075 50.475,83.75 U13.2@50.475,84.925
NetD32_3: D32.3 R76.2 U13.1 | length 11.4
  Top Layer w0.3: R76.2@39.975,88.65 D32.3@41.25,88.65 44.2,88.65 47.925,84.925 U13.1@49.825,84.925
NetD33_2: D33.2 R83.1 U13.6 | length 5.2
  Top Layer w0.3: U13.6@53.075,84.925 53.062,84.912 53.062,82.087 D33.2@53.05,82.075 54.05,81.075 R83.1@54.05,80.1
NetD34_3: D34.3 R82.2 U13.5 | length 17.6
  Top Layer w0.3: R82.2@39.975,92.225 40,92.2 D34.3@41.25,92.2 44,92.2 44.9,91.3 44.9,88.9 46.825,86.975 49.225,86.975 51.6,86.975 52.425,86.15 U13.5@52.425,84.925
NetD35_2: D35.2 R92.1 U13.10 | length 5.4
  Top Layer w0.3: R92.1@52.175,95.625 52.175,94.55 D35.2@53.025,93.7 52.425,93.1 U13.10@52.425,90.825
NetD36_3: D36.3 R90.2 U13.11 | length 20.3
  Top Layer w0.3: R90.2@39.975,95.775 D36.3@41.25,95.775 44.5,95.775 46.025,94.25 46.025,89.425 47.475,87.975 51.1,87.975 51.8,88.675 51.8,89.5 51.775,89.525 U13.11@51.775,90.825
NetD37_2: D37.2 R96.1 U14.2 | length 4.8
  Top Layer w0.3: U14.2@62.075,38.85 63.975,38.85 64.4,38.425 R96.1@64.525,38.425 65.5,38.425 D37.2@66.35,37.575
NetD38_3: D38.3 R95.2 U14.1 | length 18.4
  Top Layer w0.3: U14.1@62.075,38.2 62.075,27.35 63.975,25.45 D38.3@63.975,25.4 63.975,22.675 63.2,21.9 R95.2@63.2,20.9
NetD39_2: D39.2 R100.1 U14.6 | length 6.3
  Top Layer w0.3: D39.2@60.875,45.6 60.025,44.75 60.025,44.1 R100.1@59.85,43.925 59.85,42.325 60.725,41.45 U14.6@62.075,41.45
NetD40_3: D40.3 R99.2 U14.5 | length 22
  Top Layer w0.3: R99.2@60.05,20.9 60.05,22.05 60.687,22.687 60.687,25.45 60.15,25.988 60.15,40.25 60.7,40.8 U14.5@62.075,40.8
NetD41_2: D41.2 R104.1 U14.10 | length 4.6
  Top Layer w0.3: D41.2@52.025,41.575 52.9,40.7 R104.1@54.025,40.7 54.95,40.7 55,40.75 56.125,40.75 U14.10@56.175,40.8
NetD42_3: D42.3 R103.2 U14.11 | length 22.6
  Top Layer w0.3: U14.11@56.175,40.15 56.25,40.225 58.2,40.225 59.05,39.375 59.05,34.775 57.4,33.125 D42.3@57.4,25.4 57.4,22.675 56.9,22.175 R103.2@56.9,20.875
NetF1_1: F1.1 J3.5 J4.3 J5.7 J6.5 J7.4 J8.10 | length 252.9
  Top Layer w0.7: F1.1@18.275,17.075 18.275,16.48 20,14.755 J7.4@20,12
  Bottom Layer w1: J8.10@27,88 27.153,88.153 28.553,88.153 29.625,89.225 29.625,91.45 27.9,93.175 13.275,93.175 6.575,86.475 6.575,54.075 10.45,50.2 10.45,41.275 3.725,34.55 3.725,23.875 10.55,17.05 18.225,17.05 20,15.275 J7.4@20,12 20.1,11.9 22.4,11.9 23.475,10.825 23.475,7.6 24.475,6.6 35.05,6.6 ; J4.3@31.5,12 33.95,12 35.05,10.9 35.05,8.275 ; 33.375,6.6 ccw(c33.375,8.275) 35.05,8.275 ; J3.5@49,12 51.575,12 52.65,10.925 52.65,8.763 ; 50.487,6.6 ccw(c50.487,8.763) 52.65,8.763 ; J6.5@66.5,12 68.95,12 70.425,10.525 70.425,6.6 ; 72.388,6.6 cw(c72.388,8.563) 70.425,8.563 cw(c68.462,8.563) 68.462,6.6 ; J5.7@90,12 92.1,9.9 92.1,7.9 90.8,6.6 70.425,6.6 ; 35.05,6.6 36.725,6.6 ; 35.05,6.6 35.05,8.275 ; 35.05,8.275 ccw(c36.725,8.275) 36.725,6.6 ; 36.725,6.6 52.65,6.6 ; 52.65,6.6 54.813,6.6 ; 52.65,6.6 52.65,8.763 ; 52.65,8.763 ccw(c54.813,8.763) 54.813,6.6 ; 54.813,6.6 68.462,6.6 ; 68.462,6.6 70.425,6.6
NetFB3_2: FB3.2 R47.1 | length 1
  Top Layer w0.3: FB3.2@66.955,29.05 R47.1@66.955,30.075
NetFB4_2: FB4.2 R49.1 | length 1
  Top Layer w0.3: FB4.2@81.575,29.075 R49.1@81.575,30.1
NetFB5_2: FB5.2 R51.1 | length 1
  Top Layer w0.3: FB5.2@78.441,29.05 78.441,30.066 R51.1@78.45,30.075
NetFB6_2: FB6.2 R53.1 | length 1
  Top Layer w0.3: R53.1@75.575,30.075 75.582,30.068 FB6.2@75.582,29.05
NetFB7_2: FB7.2 R55.1 | length 1
  Top Layer w0.3: FB7.2@72.723,29.05 72.723,30.073 R55.1@72.725,30.075
NetFB8_2: FB8.2 R57.1 | length 1.1
  Top Layer w0.3: FB8.2@69.839,29.05 69.839,30.014 R57.1@69.9,30.075
NetJ2_1: J2.1 R2.1 R3.2 | length 36.2
  Top Layer w0.25: R3.2@96.5,59.3 97.675,59.3 R2.1@97.7,59.325 97.7,58.325 98.075,57.95 100.025,57.95 100.775,57.2 100.775,41.675 96.637,37.537 96.637,33.438 98.445,31.63 J2.1@98.445,29.165
NetJ2_2: J2.2 R1.1 R4.2 | length 44.1
  Top Layer w0.25: R4.2@96.5,64.4 R1.1@97.75,64.4 97.75,64.525 98.725,65.5 100.5,65.5 101.475,64.525 101.475,41.65 97.15,37.325 97.15,33.65 99.715,31.085 J2.2@99.715,29.165
NetJ9_1: J9.1 R9.1 R10.1 | length 7.8
  Top Layer w0.5: R9.1@65.45,89.675 65.462,89.687 65.462,91.712 R10.1@65.475,91.725 65.475,97.475 J9.1@65.5,97.5
NetJ10_1: J10.1 R21.2 | length 5
  Top Layer w0.3: J10.1@2.3,44.25 R21.2@7.3,44.25
NetJ10_2: J10.2 R23.2 R25.1 U5.4 | length 19
  Top Layer w0.25: R23.2@7.275,40.7 7.275,39.55 6.475,38.75 6.475,37.825 R25.1@6.475,37.725 6.575,37.825 v1(8.45,37.825) ; v1(15.925,37.475) U5.4@16.575,37.475
  Top Layer w0.3: J10.2@2.3,41.75 6.1,41.75 6.975,40.875 7.15,40.7 R23.2@7.275,40.7
  Bottom Layer w0.25: v1(8.45,37.825) 15.575,37.825 v1(15.925,37.475)
NetL1_2: L1.2 R5.2 | length 1.2
  Top Layer w0.25: R5.2@96.475,62.95 L1.2@97.7,62.95
NetL2_2: L2.2 R6.1 | length 1.2
  Top Layer w0.25: R6.1@96.5,60.875 L2.2@97.725,60.875
NetPTC6_1: PTC6.1 Q4.3 | length 4
  Top Layer w0.5: Q4.3@47.7,24.325 49.075,24.325 49.8,23.6 PTC6.1@49.8,22
NetPTC7_1: PTC7.1 Q6.3 | length 4.3
  Top Layer w0.5: PTC7.1@39.15,22.025 39.15,23.675 39.825,24.35 41.475,24.35 Q6.3@41.5,24.325
NetPTC8_1: PTC8.1 U11.16 | length 9.8
  Top Layer w0.3: U11.16@93.445,29.028 94.572,29.028 96.7,26.9 100.175,26.9 100.9,26.175 100.9,25.15 PTC8.1@101,25.05
NetPTC9_1: PTC9.1 U11.15 | length 7.9
  Top Layer w0.3: U11.15@92.175,29.313 92.175,27.85 92.625,27.4 94.85,27.4 97.2,25.05 PTC9.1@97.5,25.05
NetPTC10_1: PTC10.1 U11.14 | length 6.9
  Top Layer w0.3: U11.14@90.905,29.463 90.905,27.37 91.65,26.625 93.625,26.625 94,26.25 PTC10.1@94,25.05
NetPTC11_1: PTC11.1 U11.13 | length 4.3
  Top Layer w0.3: U11.13@89.635,29.028 89.635,27.54 90.135,27.04 90.135,25.415 PTC11.1@90.5,25.05
NetPTC12_1: PTC12.1 U11.12 | length 4.5
  Top Layer w0.3: PTC12.1@87,25.05 87,25.95 88.365,27.315 U11.12@88.365,29.028
NetPTC13_1: PTC13.1 U11.11 | length 7
  Top Layer w0.3: PTC13.1@83.5,25.05 83.5,26.4 84.175,27.075 86.825,27.075 87.095,27.345 U11.11@87.095,29.028
NetPTC14_1: PTC14.1 U15.4 | length 1.8
  Top Layer w0.3: PTC14.1@54.5,16.725 U15.4@54.5,18.5
NetQ1_1: Q1.1 U4.5 | length 4
  Top Layer w0.4: U4.5@8.05,27.75 8.05,26.35 9.55,24.85 Q1.1@9.55,24.4
NetQ2_1: Q2.1 Q3.3 R27.1 | length 5.6
  Top Layer w0.25: R27.1@9.7,33.9 9.7,35.05 Q2.1@9.875,35.225 ; Q3.3@9.825,38.7 Q3.3@9.825,38.75 9.125,38.05 9.125,35.95 9.85,35.225 Q2.1@9.875,35.225 ; Q2.1@9.9,35.225 Q2.1@9.875,35.225
NetQ2_3: Q2.3 R25.2 | length 1.3
  Top Layer w0.25: R25.2@6.475,36.175 Q2.3@7.8,36.175
NetQ3_1: Q3.1 R28.2 R29.1 | length 2.7
  Top Layer w0.25: Q3.1@10.775,40.85 10.775,41.725 10.45,42.05 R29.1@10.45,42.175 R28.2@11.7,42.175
NetQ5_1: Q5.1 R37.1 R38.2 | length 2.9
  Top Layer w0.3: R37.1@48.575,39.425 48.563,39.412 48.563,38.013 R38.2@48.55,38 48.637,37.912 48.637,36.662 Q5.1@48.725,36.575
NetQ5_3: Q5.3 R36.2 | length 2.4
  Top Layer w0.3: Q5.3@47.775,34.475 47.775,33.6 48.75,32.625 R36.2@48.75,32.475
NetQ7_1: Q7.1 R42.1 R43.2 | length 2.9
  Top Layer w0.3: R42.1@42.5,39.425 R43.2@42.5,38 42.55,37.95 42.55,36.625 Q7.1@42.6,36.575